# Altium PCB PCB1.PcbDoc
Units mm, origin at the board's own origin, x right, y up, seen from the top; angles counter-clockwise.
Board outline 150 x 75 mm, 2 copper layers (Top Layer, Bottom Layer); 84 components, 73 nets, 289 pads, 0 vias.
Unrouted connection lines stored in the file: 170.
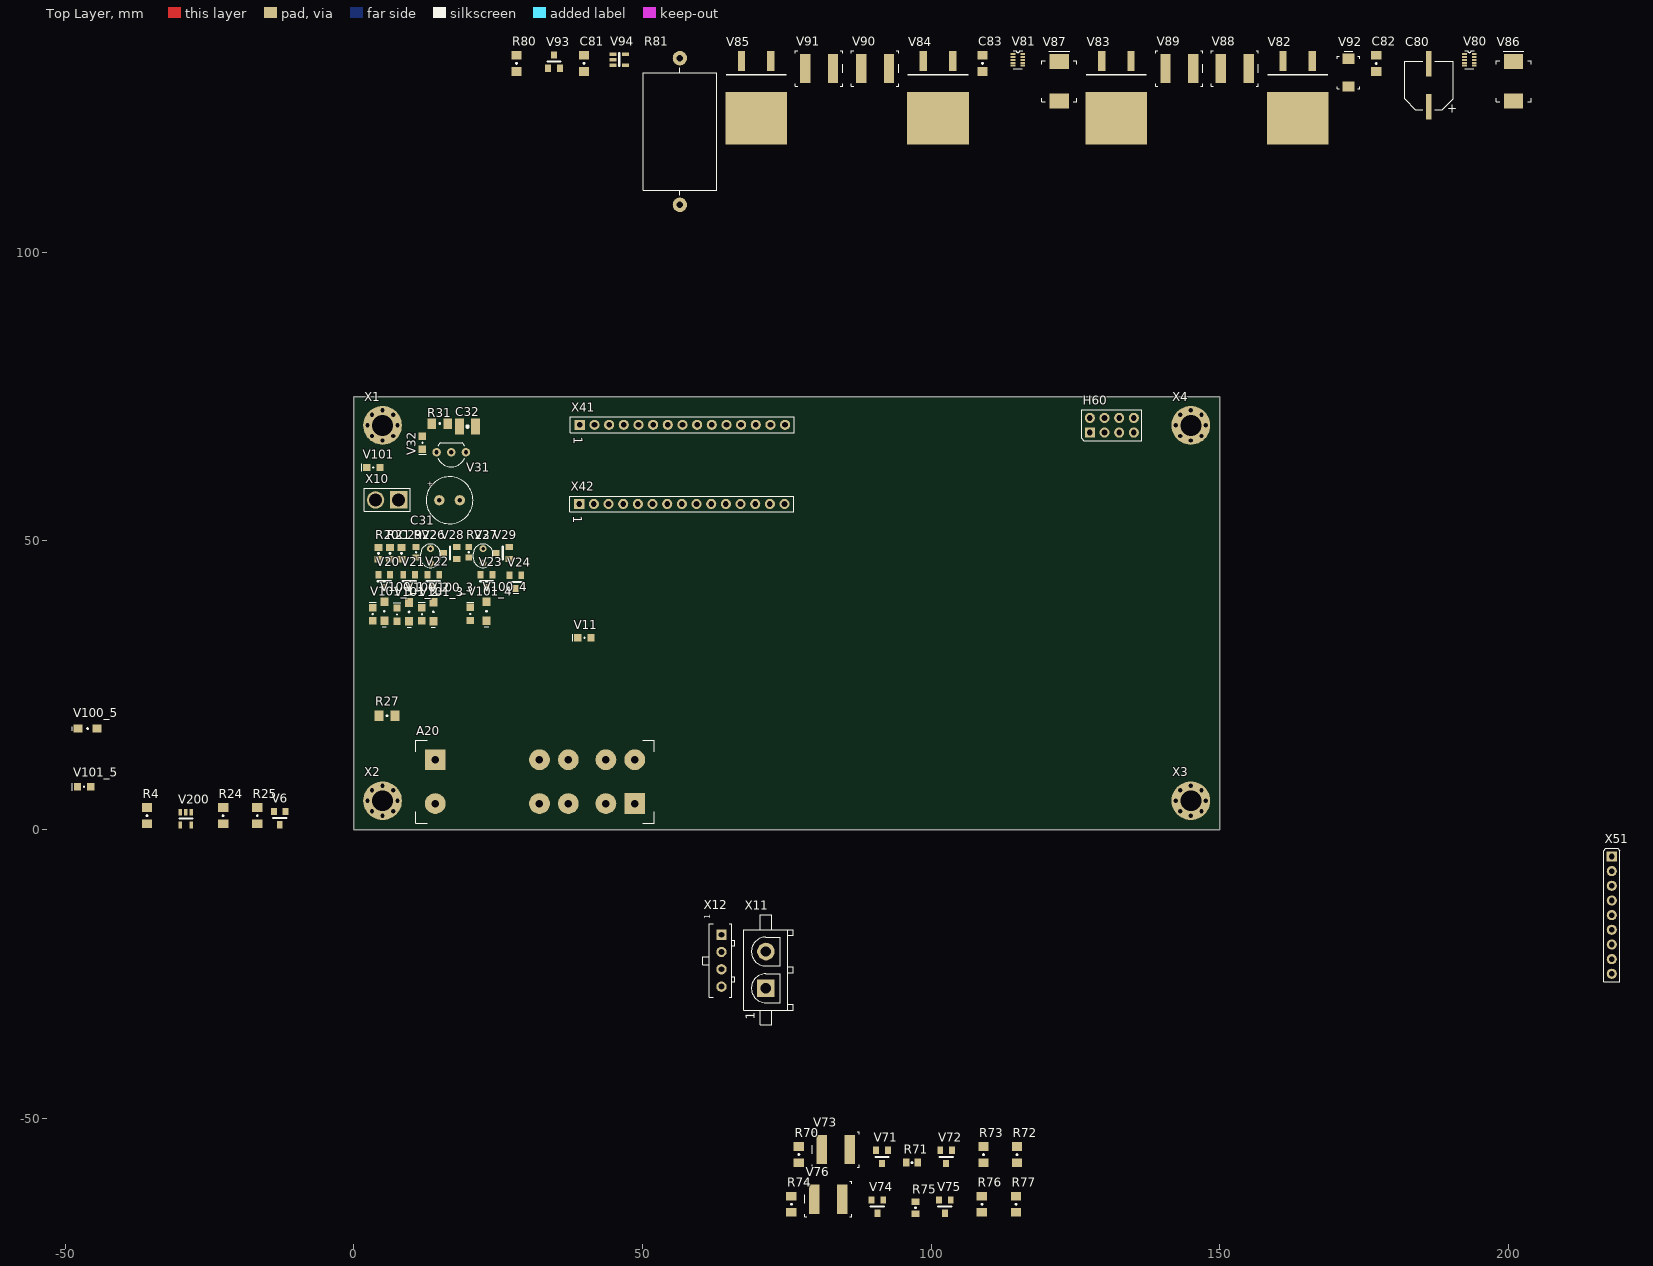
[diagram p0: Top Layer view]
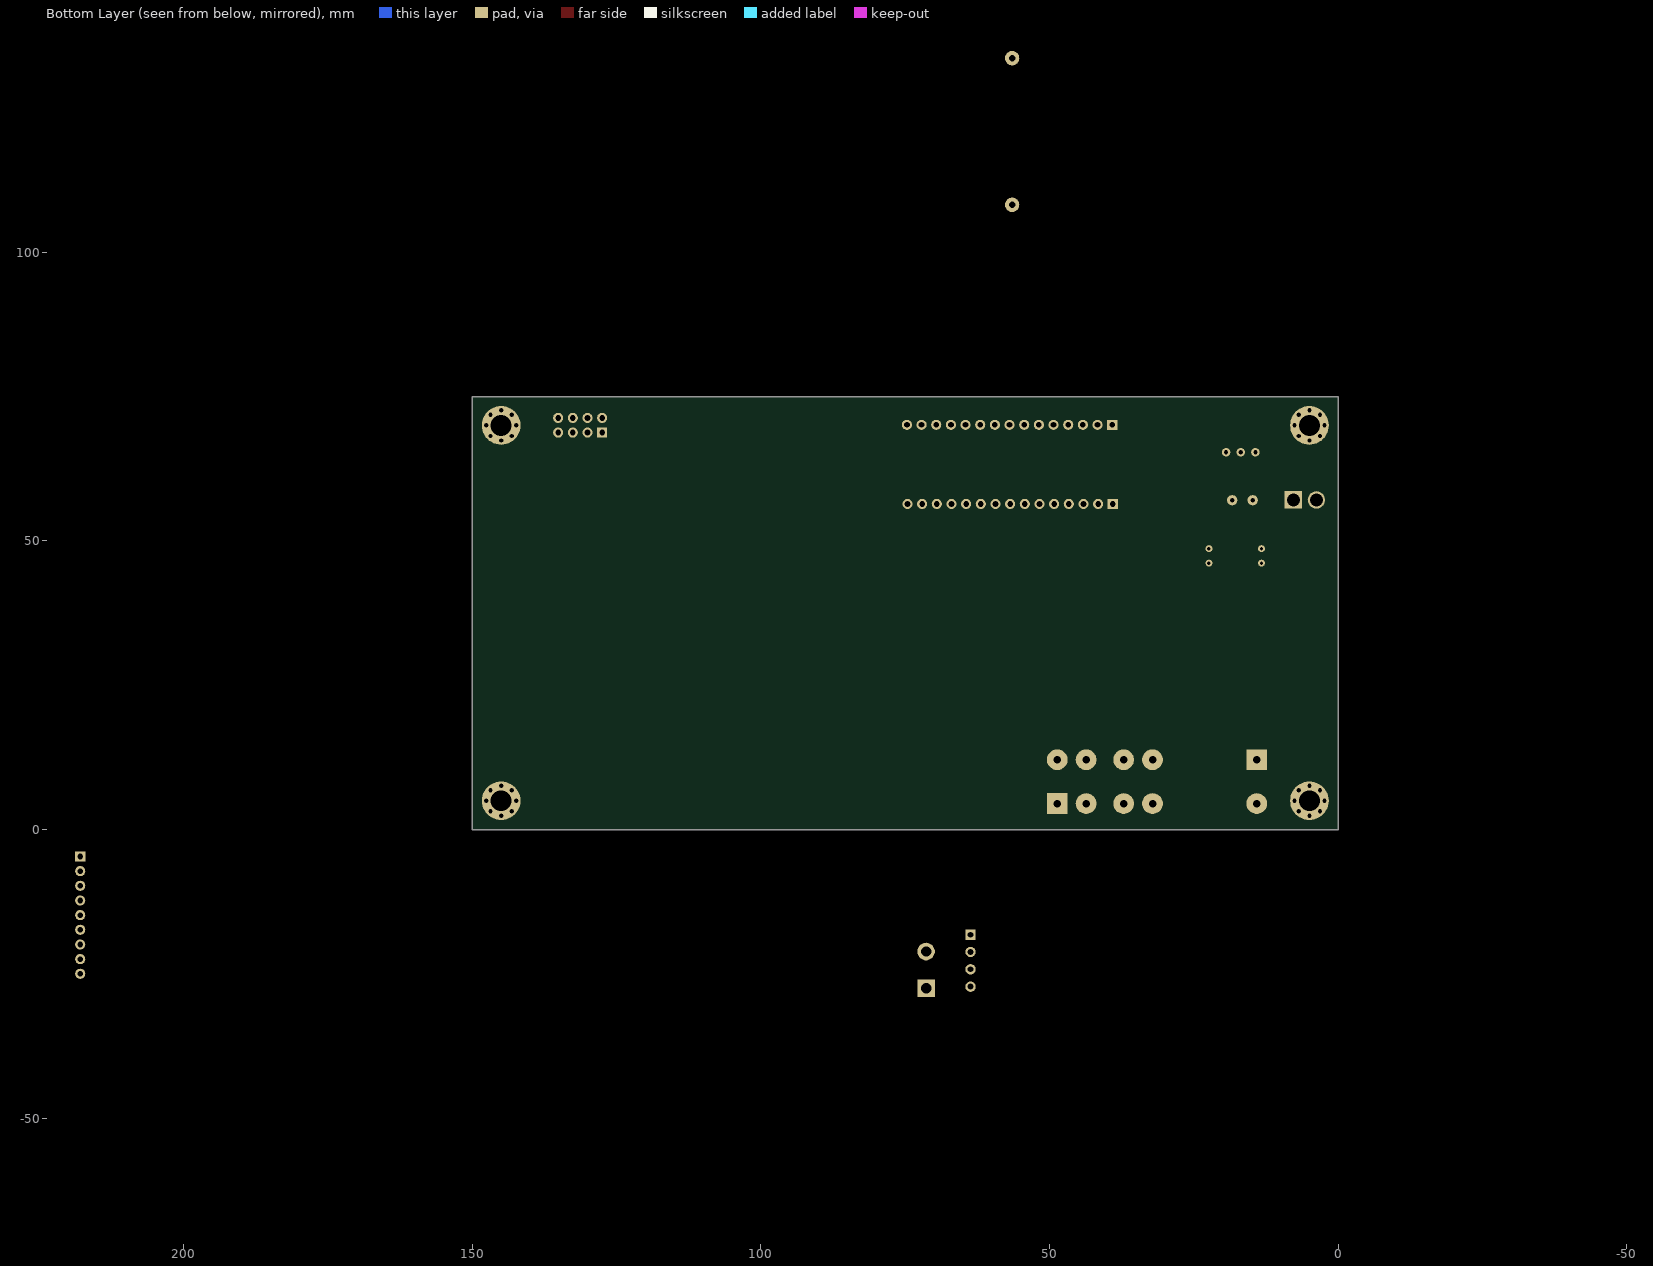
[diagram p1: Bottom Layer view, seen from below]

## Layer stack, top to bottom
Top Solder: solder mask 0.0102, Solder Resist, Dk 3.5
Top Layer: signal copper 0.0356
Dielectric 1: dielectric 0.32, FR-4, Dk 4.8
Bottom Layer: signal copper 0.0356
Bottom Solder: solder mask 0.0102, Solder Resist, Dk 3.5

## Board outline
0,0 150,0 150,75 0,75

## Design rules (kind name [scope] priority, off if disabled: settings)
Clearance [All] p1: gap=0.254
PolygonConnect [All] p1: connectstyle=Relief reliefconductorwidth=0.254 reliefentries=4 polygonreliefangle="90 Angle" airgapwidth=0.254
RoomDefinition 11_Watchdog [InComponentClass('11_Watchdog')] p1: confinementstyle=ConfineIn formatcopy=TRUE lockcomponents=FALSE outline -11,4.8 -38,4.8 -38,-2.6 -11,-2.6
RoomDefinition 8_Secret [InComponentClass('8_Secret')] p2: confinementstyle=ConfineIn formatcopy=TRUE lockcomponents=FALSE outline 27,106.709 204.2,106.709 204.2,137.708 27,137.708
RoomDefinition 7_Solenoid [InComponentClass('7_Solenoid')] p3: confinementstyle=ConfineIn formatcopy=TRUE lockcomponents=FALSE outline 115.9,-50.303 69,-50.303 69,-69.9 115.9,-69.9
RoomDefinition 6_Radio [InComponentClass('6_Radio')] p4: confinementstyle=ConfineIn formatcopy=TRUE lockcomponents=FALSE outline 136.81,67.03 136.81,72.93 123.31,72.93 123.31,67.03
RoomDefinition 5_Motor_Controller [InComponentClass('5_Motor_Controller')] p5: confinementstyle=ConfineIn formatcopy=TRUE lockcomponents=FALSE outline 216.2,-26.62 220.6,-26.62 220.6,-0.42 216.2,-0.42
RoomDefinition 5 [InComponentClass('5')] p6: confinementstyle=ConfineIn formatcopy=TRUE lockcomponents=FALSE outline -43.4,6.5 -43.4,25.6 -51.8,25.6 -51.8,6.5
RoomDefinition 4_Arduino [InComponentClass('4_Arduino')] p7: confinementstyle=ConfineIn formatcopy=TRUE lockcomponents=FALSE outline 37.26,72 37.26,53.5 79.16,53.5 79.16,72
RoomDefinition 4 [InComponentClass('4')] p8: confinementstyle=ConfineIn formatcopy=TRUE lockcomponents=FALSE outline 24.6,35 24.6,40.4 19.3,40.4 19.3,35
RoomDefinition 3_5V_Regulator [InComponentClass('3_5V_Regulator')] p9: confinementstyle=ConfineIn formatcopy=TRUE lockcomponents=FALSE outline 22.703,73.043 10.803,73.043 10.803,52.243 22.703,52.243
RoomDefinition 3 [InComponentClass('3')] p10: confinementstyle=ConfineIn formatcopy=TRUE lockcomponents=FALSE outline 14.8,34.914 14.8,40.314 10.7,40.314 10.7,34.914
RoomDefinition 2_Safety_Relay [InComponentClass('2_Safety_Relay')] p11: confinementstyle=ConfineIn formatcopy=TRUE lockcomponents=FALSE outline 45.257,0.5 45.257,50.516 0.657,50.516 0.657,0.5
RoomDefinition 2 [InComponentClass('2')] p12: confinementstyle=ConfineIn formatcopy=TRUE lockcomponents=FALSE outline 10.6,34.9 10.6,40.3 6.7,40.3 6.7,34.9
RoomDefinition 1 [InComponentClass('1')] p13: confinementstyle=ConfineIn formatcopy=TRUE lockcomponents=FALSE outline 6.4,35 6.4,40.4 2.3,40.4 2.3,35
RoutingVias [All] p1: holewidth=0.711 width=1.27 viastyle="Through Hole" minholewidth=0.711 minwidth=1.27 maxholewidth=0.711 maxwidth=1.27
SolderMaskExpansion [All] p1: expansion=0.102
Width [All] p1: maxlimit=0.254 minlimit=0.254 preferedwidth=0.254
30 further rules are at their usual default settings.

## Classes and differential pairs
component class 10_LED: V100 V101
channel class 10_LED: 1 2 3 4 5
component class 11_Watchdog: R4 R24 R25 V6 V200
component class 8_Secret: C80 C81 C82 C83 R80 R81 V80 V81 V82 V83 V84 V85 V86 V87 V88 V89 V90 V91 V92 V93 V94
component class 7_Solenoid: R70 R71 R72 R73 R74 R75 R76 R77 V71 V72 V73 V74 V75 V76
component class 6_Radio: H60
component class 5: V100_5 V101_5
component class 5_Motor_Controller: X51
component class 4: V100_4 V101_4
component class 4_Arduino: X41 X42
component class 3: V100_3 V101_3
component class 3_5V_Regulator: C31 C32 R31 V31 V32
component class 2: V100_2 V101_2
component class 1: V100_1 V101_1
component class 1_Overview: X1 X2 X3 X4 X10 X11 X12
component class 2_Safety_Relay: A1 A20 C29 R20 R21 R22 R23 R27 V11 V20 V21 V22 V23 V24 V26 V27 V28 V29

## Components (designator, comment, footprint, x,y, rotation, side; value= is the part's Value field where it differs from the comment)
A20 "RELAY SAFETY 4PST 8A 18V" RELAY-BRUMFIELD-4PST-3NO-1NC 31.4,8.3 r0 top
C29 "22u 35V" 0805 8.3,47.836 r90 top
C31 "CAP ELEC 100u 63V 20% Radial RoHS" RBP-3.5-0.8-8.0 16.603,57.043 r0 top
C32 "10u 50V" 1210 19.703,69.792 r180 top
C80 "CAP 100u 50V" CAP-ELECT-SMD-F 186.2,128.908 r0 top
C81 "1n0 1kV" 1206 39.9,132.708 r90 top
C82 "1u0 25V" 1206 177.1,132.708 r90 top
C83 "1u0 25V" 1206 108.9,132.708 r90 top
H60 "0.1 Socket Header" HDR-0.1-4x2 131.31,70.03 r90 top
R4 "10K" 1206 -35.8,2.4 r270 top
R20 "39K" 0805 4.3,47.836 r270 top
R21 "100R" 0805 6.3,47.836 r270 top
R22 "4K3" 0603 10.8,48.027 r90 top
R23 "4K3" 0603 19.9,48.027 r90 top
R24 "470R" 1206 -22.6,2.4 r270 top
R25 "1K0" 1206 -16.7,2.4 r270 top
R27 "220R" 1206 5.757,19.716 r180 top
R31 "220R" 1206 14.903,70.3 r180 top
R70 "10K" 1206 77.1,-56.3 r270 top
R71 "1K0" 0805 96.7,-57.7 r180 top
R72 "0R0 5%" 1206 114.9,-56.3 r270 top
R73 "0R0 5%" 1206 109.1,-56.3 r270 top
R74 "10K" 1206 75.8,-64.9 r270 top
R75 "1K0" 0805 97.3,-65.5 r270 top
R76 "0R0 5%" 1206 108.8,-64.9 r270 top
R77 "0R0 5%" 1206 114.7,-64.9 r270 top
R80 "1K0" 1206 28.2,132.708 r90 top
R81 "0R01" AXIAL-25.4-1.1-12.7 56.5,120.909 r90 top
V6 "BC846B" SOT23 -12.8,2 r180 top
V11 "Green, 2.1V" LED-0805 39.957,33.216 r180 top
V20 "FDV304P" SOT23 5.3,43 r180 top
V21 "FDV304P" SOT23 9.6,43 r180 top
V22 "FDV304P" SOT23 13.8,43 r180 top
V23 "FDV304P" SOT23 23,43 r180 top
V24 "FDV304P" SOT23 28,42.9 r180 top
V26 "LDR 14k@24LUX, 670k@dark" LDR_NSL-5112 13.3,47.4 r90 top
V27 "LDR 14k@24LUX, 670k@dark" LDR_NSL-5112 22.4,47.4 r90 top
V28 "10V 225mW" SOT23 16.7,47.9 r90 top
V29 "10V 225mW" SOT23 25.8,47.9 r90 top
V31 "LM78L05ACZ" TO92_W 16.903,65.343 r0 top
V32 "Green, 2.1V" LED-0805 11.9,67 r270 top
V71 "FDV304P" SOT23 91.5,-56.7 r180 top
V72 "BC846B" SOT23 102.6,-56.7 r180 top
V73 "Schottky 60V 10A" DO-214AB-DIODE 83.5,-55.4 r180 top
V74 "FDV304P" SOT23 90.7,-65.3 r180 top
V75 "BC846B" SOT23 102.4,-65.3 r180 top
V76 "Schottky 60V 10A" DO-214AB-DIODE 82.2,-64 r180 top
V80 "AAT4910" TFSOJ-8 192.4,134.308 r0 top
V81 "AAT4910" TFSOJ-8 114.2,134.308 r0 top
V82 "MOSFET P-CH -75V -100A" TO263_2_D2PAK 163.5,127.708 r90 top
V83 "MOSFET N-CH 75V 100A" TO263_2_D2PAK 132.1,127.708 r90 top
V84 "MOSFET P-CH -75V -100A" TO263_2_D2PAK 101.2,127.708 r90 top
V85 "MOSFET N-CH 75V 100A" TO263_2_D2PAK 69.7,127.708 r90 top
V86 "DIODE 40V 3A" DO214AB-DIODE 200.9,129.608 r90 top
V87 "DIODE 40V 3A" DO214AB-DIODE 122.2,129.608 r90 top
V88 "Schottky 60V 10A" DO-214AB-DIODE 152.6,131.808 r0 top
V89 "Schottky 60V 10A" DO-214AB-DIODE 143,131.808 r0 top
V90 "Schottky 60V 10A" DO-214AB-DIODE 90.3,131.808 r0 top
V91 "Schottky 60V 10A" DO-214AB-DIODE 80.6,131.808 r0 top
V92 "ZENER 20V" DO-214AA-DIODE 172.3,131.108 r90 top
V93 "BC846B" SOT23 34.7,133.008 r0 top
V94 "NC7S08M5" SOT23-5 44.9,134.308 r0 top
V100_1 "20mA" SOD123 5.3,37.8 r270 top (schematic designator V100)
V100_2 "20mA" SOD123 9.6,37.7 r270 top (schematic designator V100)
V100_3 "20mA" SOD123 13.8,37.714 r270 top (schematic designator V100)
V100_4 "20mA" SOD123 23,37.814 r270 top (schematic designator V100)
V100_5 "20mA" SOD123 -46.1,17.5 r180 top (schematic designator V100)
V101 "LED Red 12mcd@20mA 0805 RoHS" LED-0805 3.4,62.7 r180 top
V101_1 "LED Red 12mcd@20mA 0805 RoHS" LED-0805 3.3,37.3 r90 top (schematic designator V101)
V101_2 "LED Red 12mcd@20mA 0805 RoHS" LED-0805 7.5,37.243 r90 top (schematic designator V101)
V101_3 "LED Red 12mcd@20mA 0805 RoHS" LED-0805 11.8,37.3 r90 top (schematic designator V101)
V101_4 "LED Red 12mcd@20mA 0805 RoHS" LED-0805 20.2,37.357 r90 top (schematic designator V101)
V101_5 "LED Red 12mcd@20mA 0805 RoHS" LED-0805 -46.7,7.4 r180 top (schematic designator V101)
V200 "STWD100NYWY3F" SOT23-5 -28.1,3 r270 top
X1 "MH3" MH-M3-SEMS-6.7-3.6-Vias-Unplated 5,70 r0 top
X2 "MH3" MH-M3-SEMS-6.7-3.6-Vias-Unplated 5,5 r0 top
X3 "MH3" MH-M3-SEMS-6.7-3.6-Vias-Unplated 145,5 r0 top
X4 "MH3" MH-M3-SEMS-6.7-3.6-Vias-Unplated 145,70 r0 top
X10 "CONN2_12AWG_Hole" 2_Wire_12AWG 5.8,57.1 r180 top
X11 "#TE MATE-N-LOK" HDR-6.35-2-MATENLOK 71.4,-24.3 r90 top
X12 "#TE MATE-N-LOK" HDR-3.0-4X1-MICROMATENLOK-VERT 63.7,-18.2 r90 top
X41 "0.1 Socket Header" HDR-0.1-15X1 39.16,70.1 r270 top
X42 "0.1 Socket Header" HDR-0.1-15X1 39.06,56.4 r270 top
X51 "TE 87220-9" HDR-0.1-9 217.9,-14.82 r0 top

## Footprints (in the part's own frame and the unit in brackets; to place one, negate y for a bottom-side part, rotate by r counter-clockwise, add the part's x,y. Pads: shape width x height; smd on the part's side, far side on the other; paste and mask are expansions set on the pad)
2_Wire_12AWG [mm]
  rect 3x3 hole 2.25: 1(-2,0)
  round 3 hole 2.25: 2(2,0)
  silkscreen extent -4,-2 4,2
0603 [mil]
  rect 40x45 smd: 1(-35,0) 2(35,0)
  silkscreen extent -3,-4 3,3, body extent -34,-19 34,19, height 35
0805 [mil]
  rect 45x55 smd: 1(-40,0) 2(40,0)
  silkscreen extent -5,-5 5,5, body extent -44,-29 44,29, height 47
1206 [mil]
  rect 60x70 smd: 1(-55,0) 2(55,0)
  silkscreen extent -5,-5 5,5, body extent -64,-34 64,34, height 55
1210 [mil]
  rect 60x110 smd: 1(-55,0) 2(55,0)
  silkscreen extent -8,-7 7,7, body extent -64,-54 64,54, height 55
AXIAL-25.4-1.1-12.7 [mm]
  round 2.5 hole 1.1: 1(-12.7,0) 2(12.7,0)
  silkscreen extent -11.05,-6.35 11.05,6.35, body extent -12.8,-6.4 12.7,6.4, height 7.6
CAP-ELECT-SMD-F [mm]
  rect 1x4.4 smd: +(0,-3.7) -(0,3.7)
  silkscreen extent -4.2,-4.2 4.2,4.2, body extent -4.17,-4.92 4.13,4.98, height 10.21
DO214AB-DIODE [mil]
  rect 100x130 smd: a(-135,0) k(135,0)
  silkscreen extent -140,-120 205,120, body extent -140,-120 140,120, height 98
DO-214AA-DIODE [mil]
  rect 70x85 smd: a(-95,0) k(95,0)
  silkscreen extent -110,-78 145,78, body extent -110,-78 110,78, height 95
DO-214AB-DIODE [mil]
  rect 70x200 smd: a(-95,0) k(95,0)
  silkscreen extent -161,-120 161,120, body extent -161,-120 161,120, height 214
HDR-0.1-4x2 [mil]
  rect 69x69 hole 39: 1(-50,150)
  round 69 hole 39: 2(50,150) 3(-50,50) 4(50,50) 5(-50,-50) 6(50,-50) 7(-50,-150) 8(50,-150)
  silkscreen extent -105,-205 105,205, body extent -105,-205 105,205, height 787
HDR-0.1-9 [mil]
  rect 69x69 hole 39: 1(0,400)
  round 69 hole 39: 2(0,300) 3(0,200) 4(0,100) 5(0,0) 6(0,-100) 7(0,-200) 8(0,-300) 9(0,-400)
  silkscreen extent -55,-455 55,455, body extent -55,-455 55,455, height 787
HDR-0.1-15X1 [mil]
  rect 69x69 hole 39: 1(0,0)
  round 69 hole 39: 2(0,100) 3(0,200) 4(0,300) 5(0,400) 6(0,500) 7(0,600) 8(0,700) 9(0,800) 10(0,900) 11(0,1000) 12(0,1100) 13(0,1200) 14(0,1300) 15(0,1400)
  silkscreen extent -54,-64 54,1464, body extent -54,-64 54,1464, height 350
HDR-3.0-4X1-MICROMATENLOK-VERT [mm]
  rect 1.8x1.8 hole 1: 1(0,0)
  round 1.8 hole 1: 2(-3,0) 3(-6,0) 4(-9,0)
  round 0 hole 2 slot 2.41 at 90 deg unplated: M1(2.15,0) M2(-11.15,0)
  silkscreen extent -10.87,-2.32 1.87,3.22, body extent -12.55,-2.44 3.59,3.23, height 9.24
HDR-6.35-2-MATENLOK [mil]
  rect 120x120 hole 70.87: 1(-125,0)
  round 120 hole 70.87: 2(125,0)
  silkscreen extent -375,-185 375,150, body extent -375,-200 375,150, height 583
LDR_NSL-5112 [mm]
  round 1.2 hole 0.6: 1(-1.25,0) 2(1.25,0)
  silkscreen extent -2.05,-1.7 2.05,1.7, body extent -2.05,-1.7 2.05,1.7, height 1.8
LED-0805 [mil]
  rect 50x50 smd: a(-45,0) k(45,0)
  silkscreen extent -2,-25 80,25, body extent -40,-25 40,25, height 43
MH-M3-SEMS-6.7-3.6-Vias-Unplated [mm]
  round 1 hole 0.75: 1(-2.6,0) 1(-1.838,-1.838) 1(-1.838,1.838) 1(0,-2.6) 1(0,2.6) 1(1.838,-1.838) 1(1.838,1.838) 1(2.6,0)
  round 6.7 hole 3.6 unplated: 1(0,0)
RBP-3.5-0.8-8.0 [mil]
  round 70 hole 31: +(-70,0) -(70,0)
  round 70 on Top Paste: ""(-70,0) ""(70,0)
  silkscreen extent -160,-160 160,160, body extent -160,-160 160,160, height 591
RELAY-BRUMFIELD-4PST-3NO-1NC [mm]
  round 3.6 hole 1.3: 11(0.775,-3.8) 12(5.775,-3.8) 23(5.775,3.8) 24(0.775,3.8) 34(12.275,-3.8) 43(17.275,3.8) 44(12.275,3.8) A2(-17.275,-3.8)
  rect 3.6x3.6 hole 1.3: 33(17.275,-3.8) A1(-17.275,3.8)
  silkscreen extent -20.67,-7.17 20.68,7.18, body extent -20,-6.47 20,6.5, height 16.5
SOD123 [mm]
  rect 1.5x1.4 smd: a(-1.637,0) k(1.637,0)
  silkscreen extent -0.11,-0.35 2.66,0.35, body extent -1.89,-0.85 1.91,0.85, height 1.4
SOT23 [mil]
  rect 40x50 smd: x(0,45) y(40,-45) z(-40,-45)
  silkscreen extent -45,0 45,0, body extent -60,-55 60,55, height 47
SOT23-5 [mm]
  rect 1.2x0.6 smd: 1(0,0) 2(0,-0.95) 3(0,-1.9) 4(2.2,-1.9) 5(2.2,0)
  silkscreen extent 1.1,-2.05 1.1,0.15, body extent 0.3,-2.45 1.9,0.55, height 1.2
TFSOJ-8 [mm]
  rect 0.8x0.35 smd: 1(0,0) 2(0,-0.5) 3(0,-1) 4(0,-2) 4(0,-1.5) 5(1.65,-2) 5(1.65,-1.5) 6(1.65,-1) 7(1.65,-0.5) 8(1.65,0)
  silkscreen extent 0.02,-2.53 1.65,0.57, body extent -0.03,-2.6 1.73,0.65, height 1.2
TO92_W [mil] "TO92 vertical with splayed leads"
  round 58 hole 28: x(100,0) y(0,0) z(-100,0)
  silkscreen extent -91,-100 91,65, body extent -110,-103 110,62, height 394
TO263_2_D2PAK [mil]
  rect 355x420 smd: x(-177.5,0)
  rect 135x49.49 smd: y(212.5,100) z(212.5,-100)
  silkscreen extent 119,-205 119,205, body extent -352,-205 273,205, height 190

## Part data
A20: library part 9827, "Safety Relay 4PST, 3NO 1 NC"
C29: library part 8018, "Capacitor"
C31: library part 5900, "Capacitor Polarised"
C32: library part 6024, "Capacitor"
C80: library part 5174, "Capacitor Polarised"
C81: library part 5155, "Capacitor"
C82 C83: library part 2833, "Capacitor"
H60: library part 9897, "Connector 4x2 way"
R4 R70 R74: library part 3867, "Resistor"
R20: library part 3712, "Resistor"
R21: library part 3650, "Resistor"
R22 R23: library part 3520, "Resistor"
R24: library part 3835, "Resistor"
R25 R80: library part 3843, "Resistor"
R27 R31: library part 3827, "Resistor"
R71 R75: library part 3674, "Resistor"
R72 R73 R76 R77: library part 3393, "Resistor"
R81: library part 9888, "Resistor"
V6 V72 V75 V93: library part 3412, "NPN Transistor SOT23"
V11 V32: library part 6313, "LED"
V20 V21 V22 V23 V24 V71 V74: library part 5221, "MOSFET P CHANNEL GENERIC SOT23"
V26 V27: library part 9828, "LDR"
V28 V29: library part 6327, "DIODE ZENER SOT23 a-z k-x nc-y"
V31: library part 7713, "IC LM78LXX 3-terminal regulator TO92"
V73 V76 V88 V89 V90 V91: library part 9925, "DIODE SCHOTTKY GENERIC"
V80 V81: library part 9920
V82 V84: library part 9926, "MOSFET P CHANNEL GENERIC TO263"
V83 V85: library part 9927, "MOSFET N CHANNEL GENERIC TO263"
V86 V87: library part 3420, "DIODE SCHOTTKY GENERIC"
V92: library part 9928, "DIODE ZENER SMT"
V94: library part 4648, "IC TINY LOGIC AND GATE"
V100_1 V100_2 V100_3 V100_4 V100_5: library part 9913, "CURRENT REG"
V101 V101_1 V101_2 V101_3 V101_4 V101_5: library part 2785, "LED"
V200: library part 5674, "IC Watchdog Timer Circuit"
X1 X2 X3 X4: library part 7545, "MOUNTING HOLE"
X10: library part -
X11: library part 5732, "Connector 2 pin general"
X12: library part 5975, "Connector 4 pin general"
X41 X42: library part 9896, "Connector 15 pin general"
X51: library part 7236, "Connector 9 pin general"

## Nets (pads, with @x,y where several pads share a name; then routed paths per layer and width w, separated by ;. In a path a pad name is that pad's centre, name@x,y a point inside that pad or via, vN(x,y) a via of type N, cw(c..) or ccw(c..) an arc to the next point about the centre after c; other vN are vias at no path point)
5V: A20.12 A20.24 C32.1 R24.1 R31.1 V31.x V200.5 X41.12 X51.7
18V_IN: C31.+ R4.2 R20.2 R21.1 R22.2 R23.2 V20.y V31.z X10.1
18V_SW: A20.34 A20.44
DELAY: C29.1 R21.2 V20.z
EN: A20.23 V80.3 V80.7 V81.3 V81.7 V86.a V87.a V94.5 V100_5.a
GND: A20.A2 C29.2 C31.- C32.2 C80.- H60.1 R20.1 R72.1 R73.1 R76.1 R77.1 R80.1 V6.y V11.k V28.z V29.z V31.y V32.k V72.y V75.y V80.4 V81.4 V83.y V85.y V89.a V91.a V92.a V93.y V94.3 V101.k V101_1.k V101_2.k V101_3.k V101_4.k V101_5.k V200.2 V200.3 X1.1 X2.1 X3.1 X4.1 X10.2 X41.14 X42.12 X51.8
LDR_1_EN: R22.1 V22.z V26.1
LDR_2_EN: R23.1 V23.z V27.1
MOS+: V80.6 V94.1 X42.3
MOS-: V81.6 V94.2 X42.11
NetA20_11: A20.11 R27.1
NetC81_1: C81.1 V94.4
NetC81_2: C81.2 R80.2 V93.z
NetC82_1: C82.1 V80.2 V86.k
NetC82_2: C82.2 V80.1 V82.x V83.x V88.a V89.k X11.1
NetC83_1: C83.1 V81.2 V87.k
NetC83_2: C83.2 V81.1 V84.x V85.x V90.a V91.k X11.2
NetH60_2: H60.2 X41.2
NetH60_3: H60.3 X42.5
NetH60_4: H60.4 X42.6
NetH60_5: H60.5 X41.1
NetH60_6: H60.6 X42.2
NetH60_7: H60.7 X42.1
NetH60_8: H60.8
NetR4_1: R4.1 V6.x V24.z
NetR24_2: R24.2 R25.2 V200.1
NetR25_1: R25.1 V6.z
NetR27_2: R27.2 V11.a
NetR31_2: R31.2 V32.a
NetR70_1: R70.1 V72.x
NetR71_2: R71.2 V72.z
NetR72_2: R72.2 R73.2 X12.2
NetR74_1: R74.1 V75.x
NetR75_2: R75.2 V75.z
NetR76_2: R76.2 R77.2 X12.4
NetR81_1: R81.1 V93.x
NetV20_x: V20.x V21.y V100_1.a
NetV21_z: V21.z X41.5
NetV22_x: V22.x V23.y V100_3.a
NetV23_x: V23.x V24.y V100_4.a
NetV26_2: V26.2 V28.x
NetV27_2: V27.2 V29.x
NetV71_x: V71.x V73.a X12.1
NetV74_x: V74.x V76.a X12.3
NetV80_5: V80.5 V83.z
NetV80_8: V80.8 V82.z
NetV81_5: V81.5 V85.z
NetV81_8: V81.8 V84.z
NetV100_1_k: V100_1.k V101_1.a
NetV100_2_k: V100_2.k V101_2.a
NetV100_3_k: V100_3.k V101_3.a
NetV100_4_k: V100_4.k V101_4.a
NetV100_5_k: V100_5.k V101_5.a
NetV100_k: V101.a
NetV200_4: V200.4 X41.4
NetX41_3: X41.3
NetX41_6: X41.6
NetX41_7: X41.7
NetX41_8: X41.8
NetX41_9: X41.9
NetX41_10: X41.10
NetX41_11: X41.11
NetX41_13: X41.13 X42.13
NetX41_15: X41.15
NetX42_4: X42.4 X51.5
NetX42_7: X42.7 X51.4
NetX42_8: X42.8 X51.2
NetX42_10: X42.10 X51.1
NetX42_14: X42.14
NetX42_15: X42.15
RELAY_EN: A20.A1 V24.x
RELAY_FB_EN: A20.43 V21.x V22.y V100_2.a
V+: A20.33 C80.+ R70.2 R74.2 R81.2 V71.y V73.k V74.y V76.k V82.y V84.y V88.k V90.k V92.k
pads on no net: C31. R71.1 R75.1 V28.y V29.y V71.z V74.z X12.M1 X12.M2 X42.9 X51.3 X51.6 X51.9

## Silkscreen, mask and mechanical layers (free items; w line width, h text height)
Mechanical 3:
  lines w1: 150,0 0,0 0,75 150,75 150,0 ; 150,0 150,0

## Text inside footprints (layer, text, board x,y; h text height)
C31: Top Overlay "+" at 12.666,59.456 h1.02; Mechanical 4 "+" at 12.666,59.456 h1.02
C80: Top Overlay "+" at 189.418,124.123 h1.5; Mechanical 4 "+" at 189.418,124.123 h1.5
X11: Top Overlay "1" at 69.47,-32.936 h1.52 r90
X12: Top Overlay "1" at 61.795,-15.533 h1.02 r90
X41: Top Overlay "1" at 38.115,68.02 h1.52 r270
X42: Top Overlay "1" at 38.015,54.32 h1.52 r270